# EAGLE board IO_Experiments Board (EAGLE 9.5.1), part 1 of 2
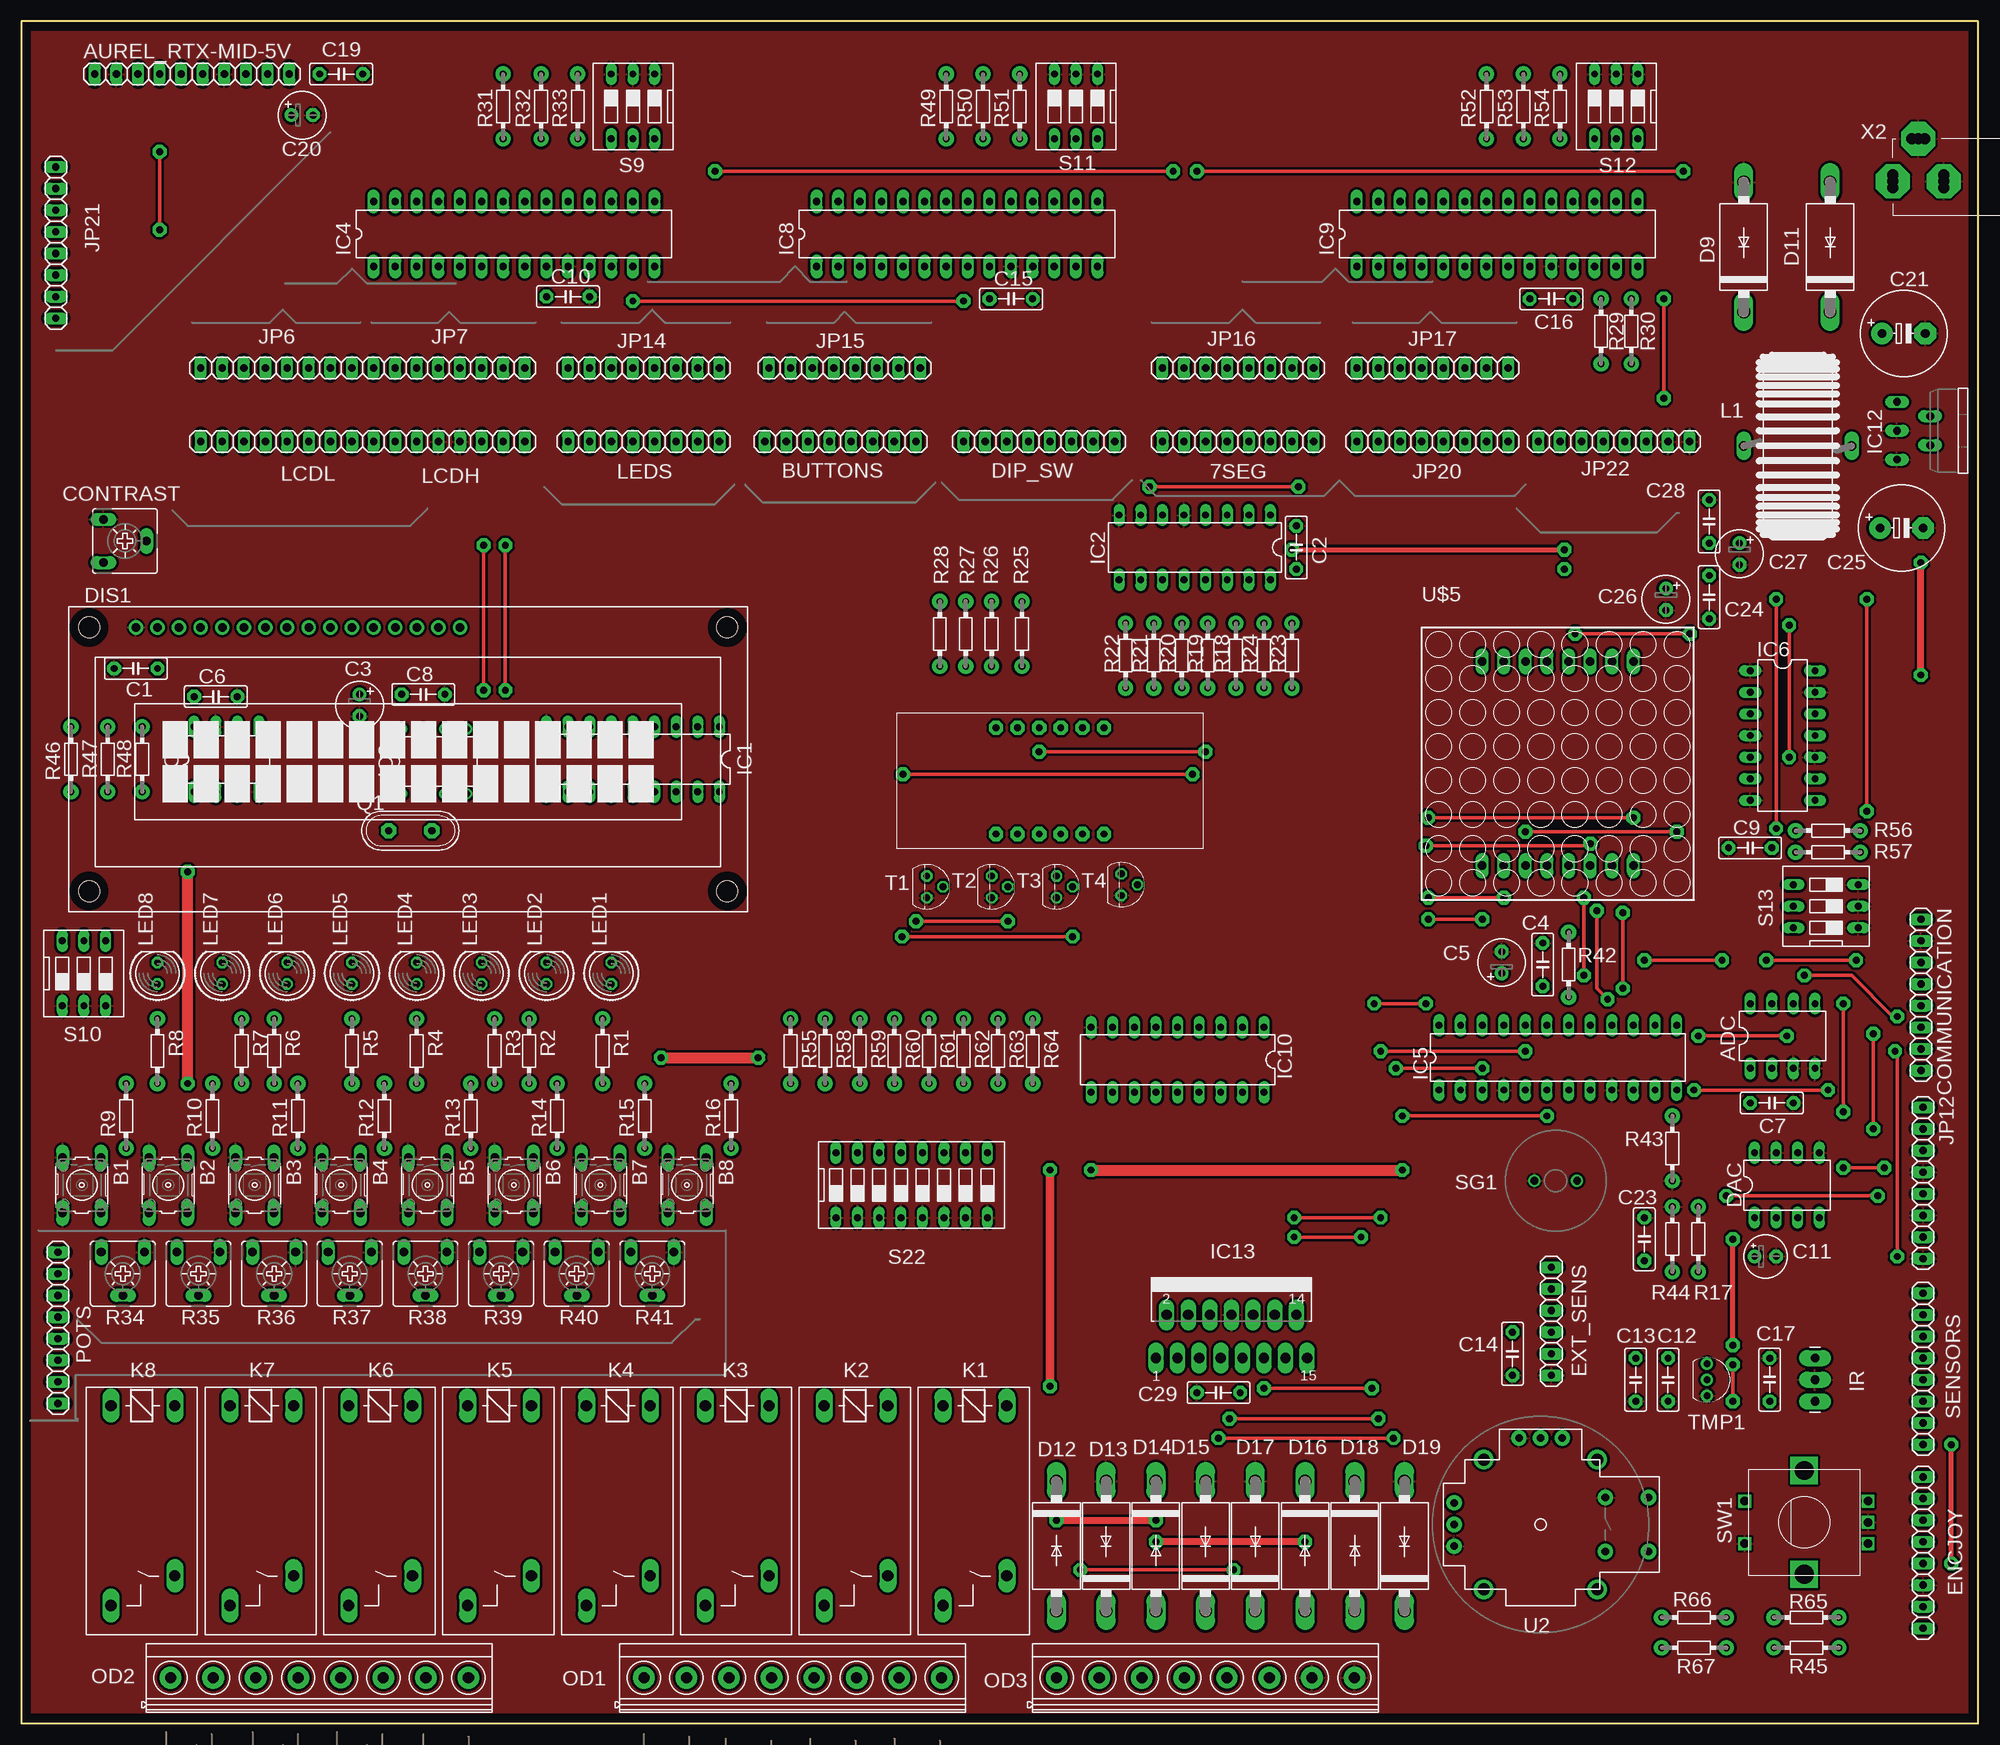
[diagram p0: board, top side]
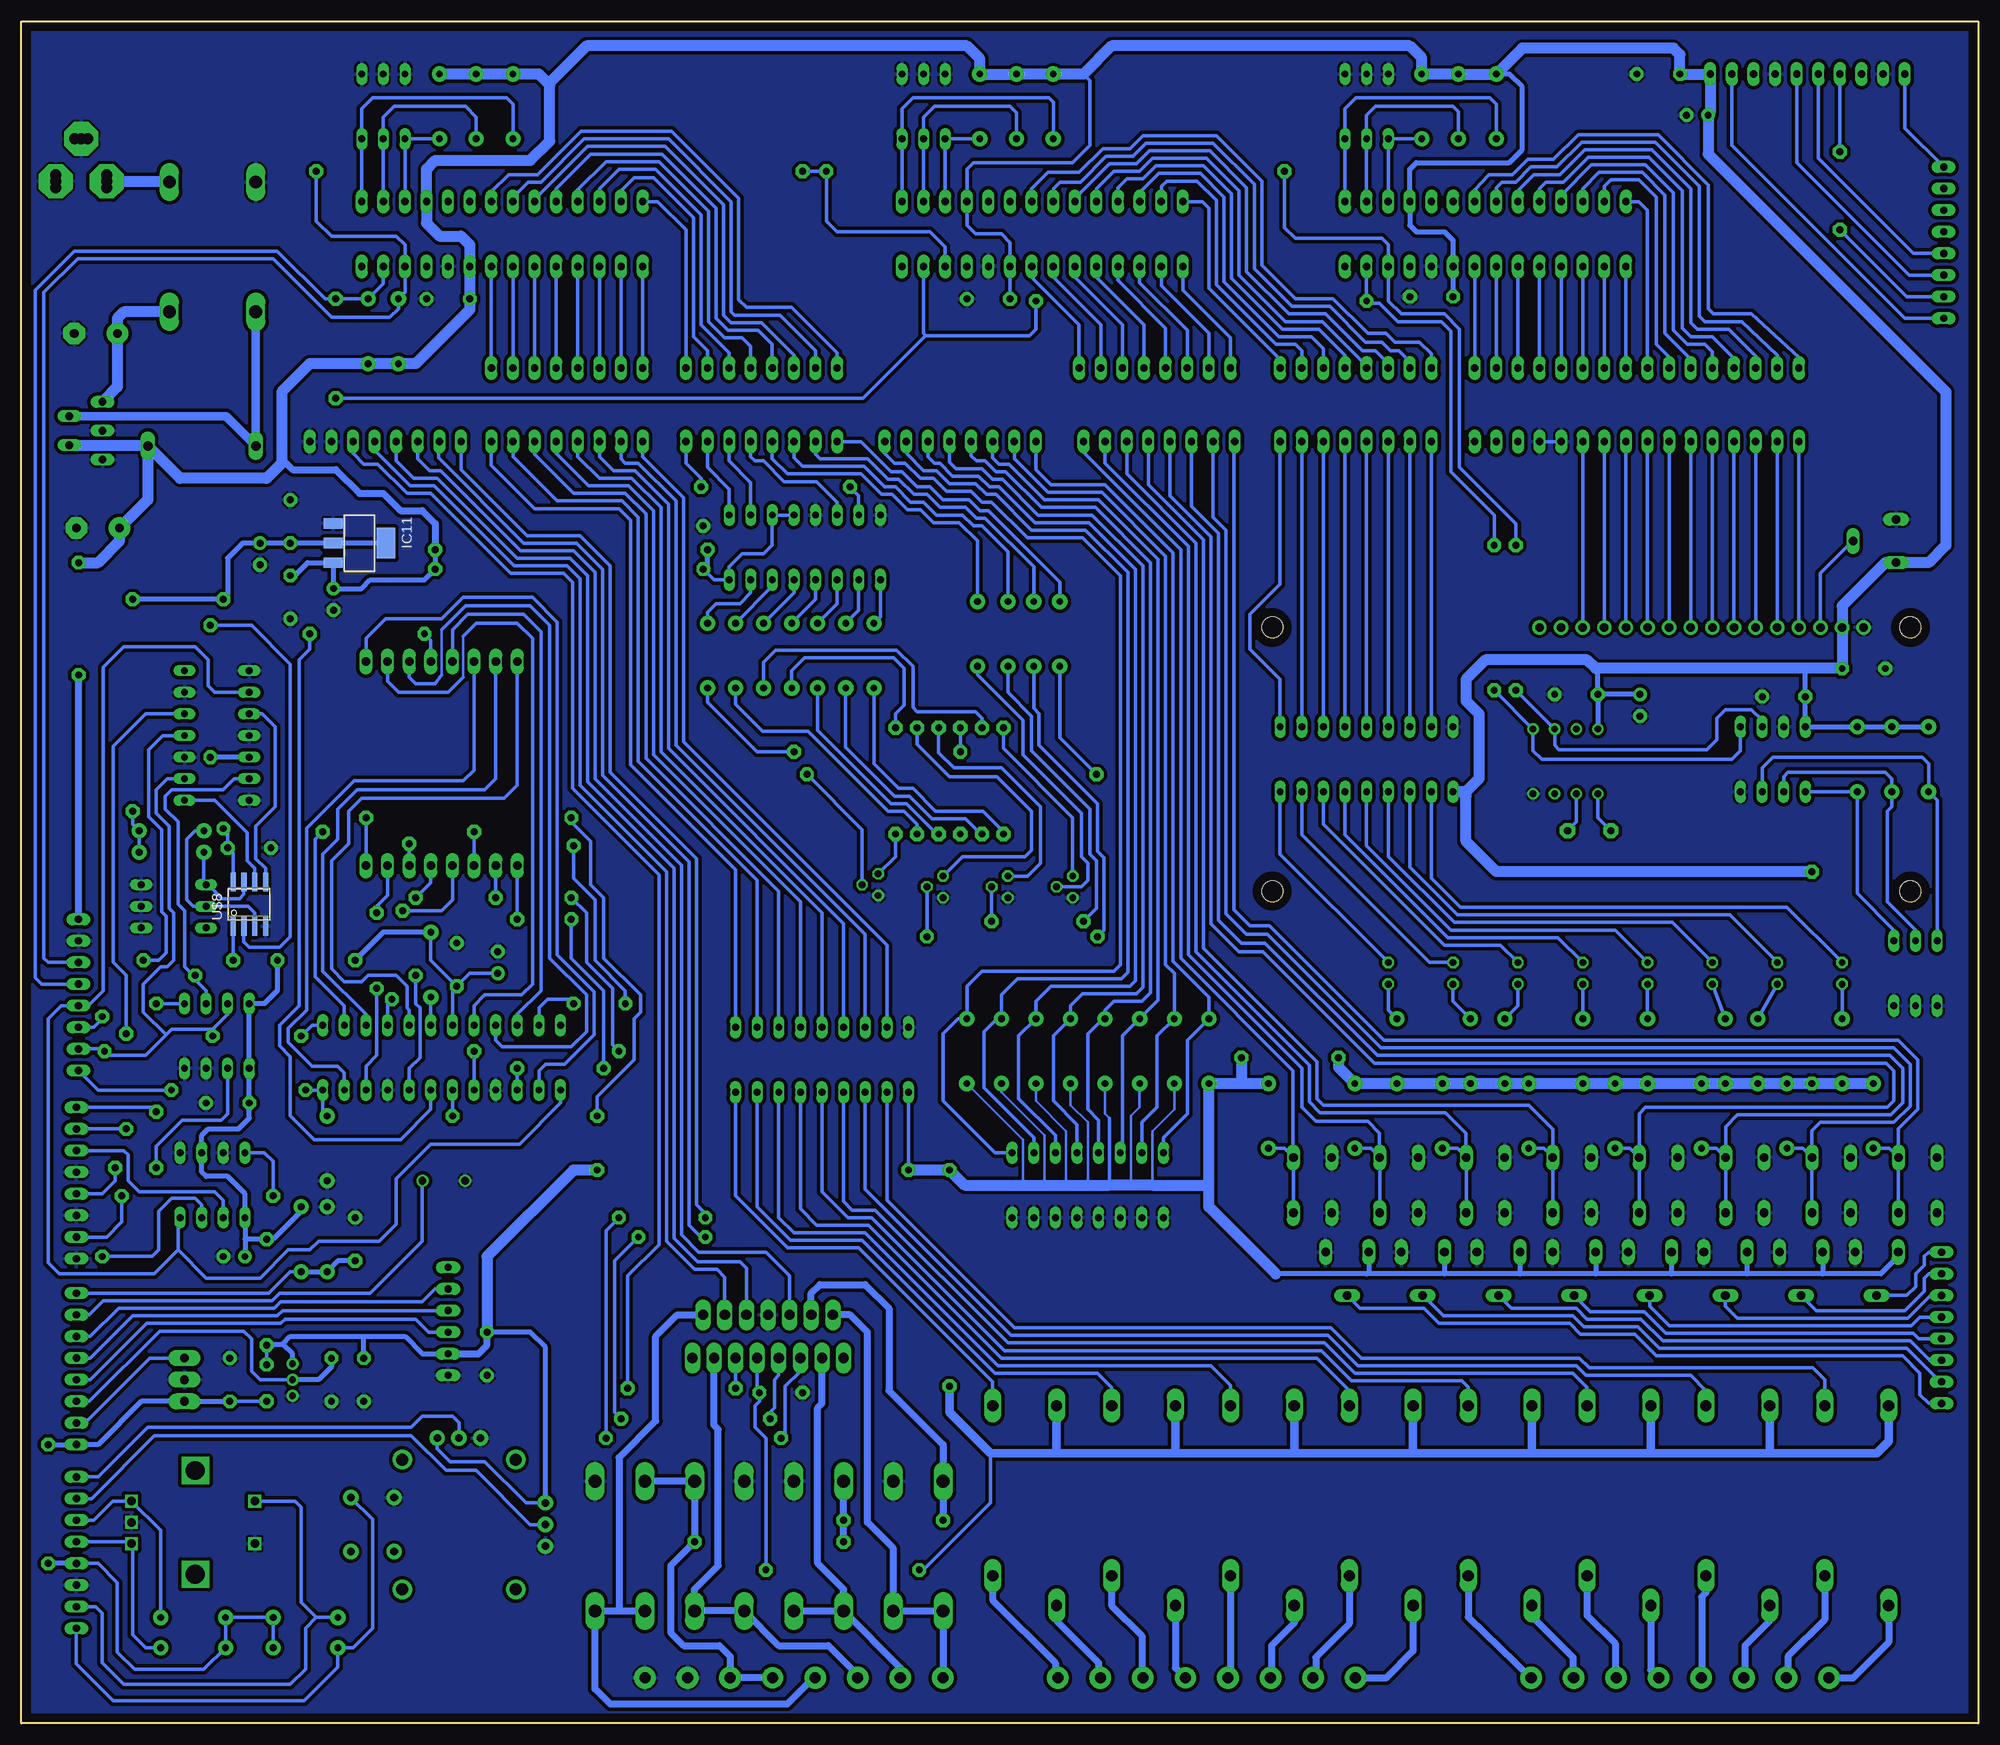
[diagram p1: board, bottom side, seen from below]

Size 230 x 200 mm. Coordinates in mm from the lower left corner, seen from the top.
Outline: 0,0 230,0 230,200 0,200 0,0
Copper layers (1*16): Top 0.035mm / dielectric 1.5mm / Bottom 0.035mm
Design rules "default *": minimum track width 10mil, minimum drill 24mil, track to track 12mil, track to pad 12mil, pad to pad 12mil, via to via 12mil, smd to smd 12mil, copper to edge 40mil, drill to drill 8mil, minimum pad ring 10mil, minimum via ring 16mil, stop-mask expansion 4mil, vias tented up to drill 32mil, thermal gap 10mil
Net classes: 1 power: width 0.61 mm, drill 0.61 mm, clearance 0.254 mm; 2 gnd: width 0.305 mm, drill 0.559 mm, clearance 0.254 mm; 3 usbvcc: width 0.508 mm, drill 0.61 mm, clearance 0.254 mm

## Footprints (pad centres in the part's own frame; a part is rotated, then mirrored left to right if it is on the bottom)
1X08 = drill 0.85 pad 1.422 long: 1 -8.89,0; 2 -6.35,0; 3 -3.81,0; 4 -1.27,0; 5 1.27,0; 6 3.81,0; 7 6.35,0; 8 8.89,0
DIL08 = drill 0.813 long: 1 -3.81,-3.81; 2 -1.27,-3.81; 3 1.27,-3.81; 4 3.81,-3.81; 5 3.81,3.81; 6 1.27,3.81; 7 -1.27,3.81; 8 -3.81,3.81
1X10 = drill 0.85 pad 1.422 long: 1 -11.43,0; 2 -8.89,0; 3 -6.35,0; 4 -3.81,0; 5 -1.27,0; 6 1.27,0; 7 3.81,0; 8 6.35,0; 9 8.89,0; 10 11.43,0
B3F-10XX = drill 1.016 long: 1 -3.251,2.261; 2 3.251,2.261; 3 -3.251,-2.261; 4 3.251,-2.261
C5B2.5 = drill 0.813 pad 1.6 octagon: 1 -2.54,0; 2 2.54,0
E2,5-6 = drill 0.813 pad 1.6: + -1.27,0 | drill 0.813 pad 1.6 octagon: - 1.27,0
E2,5-5 = drill 0.813 pad 1.6: + -1.27,0 | drill 0.813 pad 1.6 octagon: - 1.27,0
E5-10,5 = drill 1.016 pad 2.54: + -2.54,0 | drill 1.016 pad 2.54 octagon: - 2.54,0
CA6V = drill 1.016 long: A -2.54,-2.54; E 2.54,-2.54; S 0,2.54
DO201-15 = drill 1.499 long: A 7.62,0; C -7.62,0
TUXGR_16X2_R2 = drill 1 pad 1.676: 1 -32,15.5; 2 -29.46,15.5; 3 -26.92,15.5; 4 -24.38,15.5; 5 -21.84,15.5; 6 -19.3,15.5; 7 -16.76,15.5; 8 -14.22,15.5; 9 -11.68,15.5; 10 -9.14,15.5; 11 -6.6,15.5; 12 -4.06,15.5; 13 -1.52,15.5; 14 1.02,15.5; 15 3.56,15.5; 16 6.1,15.5 | hole 2.5: -37.5,-15.5; 37.5,-15.5; -37.5,15.5; 37.5,15.5
LFD039AUE = drill 0.8 pad 1.676 octagon: 1 -6.35,-6.25; 2 -3.81,-6.25; 3 -1.27,-6.25; 4 1.27,-6.25; 5 3.81,-6.25; 6 6.35,-6.25; 7 6.35,6.25; 8 3.81,6.25; 9 1.27,6.25; 10 -1.27,6.25; 11 -3.81,6.25; 12 -6.35,6.25
1X06 = drill 0.85 pad 1.422 long: 1 -6.35,0; 2 -3.81,0; 3 -1.27,0; 4 1.27,0; 5 3.81,0; 6 6.35,0
DIL18 = drill 0.813 long: 1 -10.16,-3.81; 2 -7.62,-3.81; 3 -5.08,-3.81; 4 -2.54,-3.81; 5 0,-3.81; 6 2.54,-3.81; 7 5.08,-3.81; 8 7.62,-3.81; 9 10.16,-3.81; 10 10.16,3.81; 11 7.62,3.81; 12 5.08,3.81; 13 2.54,3.81; 14 0,3.81; 15 -2.54,3.81; 16 -5.08,3.81; 17 -7.62,3.81; 18 -10.16,3.81
DIL16 = drill 0.813 long: 1 -8.89,-3.81; 2 -6.35,-3.81; 3 -3.81,-3.81; 4 -1.27,-3.81; 5 1.27,-3.81; 6 3.81,-3.81; 7 6.35,-3.81; 8 8.89,-3.81; 9 8.89,3.81; 10 6.35,3.81; 11 3.81,3.81; 12 1.27,3.81; 13 -1.27,3.81; 14 -3.81,3.81; 15 -6.35,3.81; 16 -8.89,3.81
DIL08' = drill 0.813 pad 1.27: 1 -3.81,-3.81; 2 -1.27,-3.81; 3 1.27,-3.81; 4 3.81,-3.81; 5 3.81,3.81; 6 1.27,3.81; 7 -1.27,3.81; 8 -3.81,3.81
DIL28-3 = drill 0.85 pad 1.422 long: 1 -16.51,-3.81; 2 -13.97,-3.81; 3 -11.43,-3.81; 4 -8.89,-3.81; 5 -6.35,-3.81; 6 -3.81,-3.81; 7 -1.27,-3.81; 8 1.27,-3.81; 9 3.81,-3.81; 10 6.35,-3.81; 11 8.89,-3.81; 12 11.43,-3.81; 13 13.97,-3.81; 14 16.51,-3.81; 15 16.51,3.81; 16 13.97,3.81; 17 11.43,3.81; 18 8.89,3.81; 19 6.35,3.81; 20 3.81,3.81; 21 1.27,3.81; 22 -1.27,3.81; 23 -3.81,3.81; 24 -6.35,3.81; 25 -8.89,3.81; 26 -11.43,3.81; 27 -13.97,3.81; 28 -16.51,3.81
DIL24-3 = drill 0.813 long: 1 -13.97,-3.81; 2 -11.43,-3.81; 3 -8.89,-3.81; 4 -6.35,-3.81; 5 -3.81,-3.81; 6 -1.27,-3.81; 7 1.27,-3.81; 8 3.81,-3.81; 9 6.35,-3.81; 10 8.89,-3.81; 11 11.43,-3.81; 12 13.97,-3.81; 13 13.97,3.81; 14 11.43,3.81; 15 8.89,3.81; 16 6.35,3.81; 17 3.81,3.81; 18 1.27,3.81; 19 -1.27,3.81; 20 -3.81,3.81; 21 -6.35,3.81; 22 -8.89,3.81; 23 -11.43,3.81; 24 -13.97,3.81
DIL14 = drill 0.813 long: 1 -7.62,-3.81; 2 -5.08,-3.81; 3 -2.54,-3.81; 4 0,-3.81; 5 2.54,-3.81; 6 5.08,-3.81; 7 7.62,-3.81; 8 7.62,3.81; 9 5.08,3.81; 10 2.54,3.81; 11 0,3.81; 12 -2.54,3.81; 13 -5.08,3.81; 14 -7.62,3.81
SOT223 = smd 1.219 x 2.235: 1 -2.311,-3.099; 2 0,-3.099; 3 2.311,-3.099 | smd 3.6 x 2.2: 4 0,3.099
TO220-51 = drill 0.9 long: 1 -3.4,-8.4; 2 -1.7,-4.5; 3 0,-8.4; 4 1.7,-4.5; 5 3.4,-8.4
MULTIWATT-15 = drill 1.2 long: 1 -8.89,-7.62; 2 -7.62,-2.54; 3 -6.35,-7.62; 4 -5.08,-2.54; 5 -3.81,-7.62; 6 -2.54,-2.54; 7 -1.27,-7.62; 8 0,-2.54; 9 1.27,-7.62; 10 2.54,-2.54; 11 3.81,-7.62; 12 5.08,-2.54; 13 6.35,-7.62; 14 7.62,-2.54; 15 8.89,-7.62
1X03_LONGPADS = drill 1.016 pad 1.88 long: 1 0,0; 2 2.54,0; 3 5.08,0
G2RA = drill 1.321 long: 1 -3.81,-3.683; 2 -3.81,3.81; P 16.18,3.81; S 19.685,-3.683
SFT1030 = drill 1.118 long: 1 -6.35,0; 2 6.35,0
LED5MM = drill 0.813 octagon: A -1.27,0; K 1.27,0
MKDSN1,5/8-5,08 = drill 1.3 pad 2.54: 1 -17.5,0.025; 2 -12.5,0.025; 3 -7.5,0.025; 4 -2.5,0.025; 6 7.5,0.025; 7 12.5,0.025; 8 17.5,0.025 | drill 1.3 pad 2.5: 5 2.5,0.025
QS = drill 0.85 pad 1.778 octagon: 1 -2.54,0; 2 2.54,0
RS1/8 = drill 0.8 pad 1.778: 1 -3.81,0; 2 3.81,0
DS-03 = drill 0.813 long: 1 -2.54,-3.81; 2 0,-3.81; 3 2.54,-3.81; 4 2.54,3.81; 5 0,3.81; 6 -2.54,3.81
DS-08 = drill 0.813 long: 1 -8.89,-3.81; 2 -6.35,-3.81; 3 -3.81,-3.81; 4 -1.27,-3.81; 5 1.27,-3.81; 6 3.81,-3.81; 7 6.35,-3.81; 8 8.89,-3.81; 9 8.89,3.81; 10 6.35,3.81; 11 3.81,3.81; 12 1.27,3.81; 13 -1.27,3.81; 14 -3.81,3.81; 15 -6.35,3.81; 16 -8.89,3.81
BUZZER-12MM-NS-P5MM = drill 0.9: + 2.5,0; - -2.5,0
ALPS_EC12E_SW = drill 1 square: A -2.5,-7.5; B 2.5,-7.5; C 0,-7.5; D -2.5,7; E 2.5,7 | drill 2.2 square: GND1 -6.1,0; GND2 6.1,0
TO92 = drill 0.813 octagon: 1 1.27,0; 2 0,1.905; 3 -1.27,0
BC-TO92 = drill 0.8 pad 1.422: 1 -1.87,0; 2 0,0; 3 1.87,0
JOYSTICK = drill 0.9 pad 1.778: B1A -3.175,12.7; B1B 3.175,12.7; B2A -3.175,7.62; B2B 3.175,7.62 | drill 0.889 pad 1.778: H1 -2.54,-10.16; H2 0,-10.16; H3 2.54,-10.16; V1 -10.16,2.54; V2 -10.16,0; V3 -10.16,-2.54 | drill 1.397 pad 2.286: MOUNT1 -7.62,6.668; MOUNT2 -7.62,-6.668; MOUNT3 7.62,-6.668; MOUNT4 7.62,6.668
NFM-12881BG-11 = drill 1 long: 1 -8.89,-12; 2 -6.35,-12; 3 -3.81,-12; 4 -1.27,-12; 5 1.27,-12; 6 3.81,-12; 7 6.35,-12; 8 8.89,-12; 9 8.89,12; 10 6.35,12; 11 3.81,12; 12 1.27,12; 13 -1.27,12; 14 -3.81,12; 15 -6.35,12; 16 -8.89,12
SOIC-8 = smd 0.6 x 2.2: 1 -1.905,-2.6; 2 -0.635,-2.6; 3 0.635,-2.6; 4 1.905,-2.6; 5 1.905,2.6; 6 0.635,2.6; 7 -0.635,2.6; 8 -1.905,2.6
POWERSUPPLY_DC-21MM = drill 1.3 pad 4 octagon: 1 -5.08,-3.353; 2 -0.076,-6.35; 3 -0.076,-0.356 | drill 1.3: 4 -5.08,-4.115; 5 -5.08,-2.591; 6 -0.838,-0.356; 7 0.686,-0.356; 8 -0.838,-6.35; 9 0.686,-6.35

## Placement (x,y rotation side)
7SEG  FH254-108DF08500V  [1X08]  143,150.62 180 top
ADC  MCP3201-CI/P  [DIL08]  207.01,80.77 0 top
AUREL_RTX-MID-5V  FH254-110DF08500V  [1X10]  20.07,193.8 0 top
B1  10-XX  [B3F-10XX]  7.11,63.25 270 top
B2  10-XX  [B3F-10XX]  17.27,63.25 270 top
B3  10-XX  [B3F-10XX]  27.43,63.25 270 top
B4  10-XX  [B3F-10XX]  37.59,63.25 270 top
B5  10-XX  [B3F-10XX]  47.75,63.25 270 top
B6  10-XX  [B3F-10XX]  57.91,63.25 270 top
B7  10-XX  [B3F-10XX]  68.07,63.25 270 top
B8  10-XX  [B3F-10XX]  78.23,63.25 270 top
BUTTONS  FH254-108DF08500V  [1X08]  96.27,150.62 0 top
C1  100nF  [C5B2.5]  13.46,123.95 180 top
C2  100nF  [C5B2.5]  149.86,138.18 90 top
C3  1uF  [E2,5-6]  39.75,119.63 270 top
C4  100nF  [C5B2.5]  178.82,89.15 90 top
C5  1uF  [E2,5-6]  173.99,89.41 90 top
C6  100nF  [C5B2.5]  22.86,120.65 0 top
C7  100nF  [C5B2.5]  205.74,72.9 0 top
C8  100nF  [C5B2.5]  47.24,120.9 0 top
C9  100nF  [C5B2.5]  203.2,102.87 0 top
C10  100nF  [C5B2.5]  64.26,167.64 0 top
C11  1uF  [E2,5-5]  204.98,54.86 0 top
C12  100nF  [C5B2.5]  193.55,40.39 270 top
C13  100nF  [C5B2.5]  189.74,40.39 270 top
C14  100nF  [C5B2.5]  175.26,43.43 270 top
C15  100nF  [C5B2.5]  116.33,167.39 0 top
C16  100nF  [C5B2.5]  179.83,167.39 0 top
C17  100nF  [C5B2.5]  205.49,40.39 90 top
C19  100nF  [C5B2.5]  37.59,193.8 0 top
C20  100uF  [E2,5-6]  33.02,188.98 0 top
C21  470uF  [E5-10,5]  221.23,163.32 0 top
C23  100nF  [C5B2.5]  190.75,56.9 90 top
C24  100nF  [C5B2.5]  198.37,132.33 270 top
C25  470uF  [E5-10,5]  220.98,140.46 0 top
C26  100uF  [E2,5-6]  193.29,132.08 270 top
C27  100uF  [E2,5-6]  201.93,137.41 270 top
C28  100nF  [C5B2.5]  198.37,141.22 90 top
C29  100nF  [C5B2.5]  140.72,38.86 180 top
COMMUNICATION  FH254-108DF08500V  [1X08]  223.27,85.6 270 top
CONTRAST  20k  [CA6V]  12.19,138.94 270 top
D9  1N5822  [DO201-15]  202.44,173.48 90 top
D11  1N5822  [DO201-15]  212.6,173.48 90 top
D12  MBRA140  [DO201-15]  121.67,20.83 270 top
D13  MBRA140  [DO201-15]  127.51,20.83 90 top
D14  MBRA140  [DO201-15]  133.35,20.83 270 top
D15  MBRA140  [DO201-15]  139.19,20.83 90 top
D16  MBRA140  [DO201-15]  150.88,20.83 270 top
D17  MBRA140  [DO201-15]  145.03,20.83 90 top
D18  MBRA140  [DO201-15]  156.72,20.83 270 top
D19  MBRA140  [DO201-15]  162.56,20.83 90 top
DAC  MCP4921  [DIL08]  207.52,63.25 0 top
DIP_SW  FH254-108DF08500V  [1X08]  119.63,150.62 0 top
DIS1  TUXGR_16X2_R2  [TUXGR_16X2_R2]  45.47,113.28 0 top
DISP1  [LFD039AUE]  120.9,110.74 0 top
ENCJOY  FH254-108DF08500V  [1X08]  223.52,20.07 270 top
EXT_SENS  FH254-106DF08500V  [1X06]  179.83,47.24 270 top
IC1  ULN2803  [DIL18]  71.88,113.28 180 top
IC2  4511N  [DIL16]  137.92,138.18 180 top
IC3  PCF8563P  [DIL08']  48.51,113.03 0 top
IC4  MCP23017SP  [DIL28-3]  57.91,175.01 0 top
IC5  MAX7219CNG  [DIL24-3]  180.59,78.23 0 top
IC6  74125N  [DIL14]  207.01,116.08 270 top
IC7  AT24CP  [DIL08]  24.13,113.28 0 top
IC8  MCP23017SP  [DIL28-3]  109.98,175.01 0 top
IC9  MCP23017SP  [DIL28-3]  173.48,175.01 0 top
IC10  ULN2803  [DIL18]  135.89,77.98 180 top
IC11  NX1117CE33Z  [SOT223]  190.25,138.68 270 bottom
IC12  [TO220-51]  228.85,151.89 270 top
IC13  L298  [MULTIWATT-15]  142.24,50.55 0 top
IR  [1X03_LONGPADS]  210.82,42.93 270 top
JP6  FH254-108DF08500V  [1X08]  29.97,159.26 0 top
JP7  FH254-108DF08500V  [1X08]  50.29,159.26 0 top
JP12  FH254-108DF08500V  [1X08]  223.52,63.5 270 top
JP14  FH254-108DF08500V  [1X08]  73.15,159.26 0 top
JP15  FH254-108DF08500V  [1X08]  96.77,159.26 0 top
JP16  FH254-108DF08500V  [1X08]  143,159.26 0 top
JP17  FH254-108DF08500V  [1X08]  165.86,159.26 0 top
JP20  FH254-108DF08500V  [1X08]  165.86,150.62 180 top
JP21  FH254-108DF08500V  [1X08]  4.06,173.99 270 top
JP22  FH254-108DF08500V  [1X08]  187.2,150.62 0 top
K1  G2RA  [G2RA]  112.01,33.53 270 top
K2  G2RA  [G2RA]  98.04,33.53 270 top
K3  G2RA  [G2RA]  84.07,33.53 270 top
K4  G2RA  [G2RA]  70.1,33.53 270 top
K5  G2RA  [G2RA]  56.13,33.53 270 top
K6  G2RA  [G2RA]  42.16,33.53 270 top
K7  G2RA  [G2RA]  28.19,33.53 270 top
K8  G2RA  [G2RA]  14.22,33.53 270 top
L1  SFT1030  [SFT1030]  208.79,150.11 0 top
LCDH  FH254-108DF08500V  [1X08]  50.29,150.62 180 top
LCDL  FH254-108DF08500V  [1X08]  29.97,150.62 180 top
LED1  GREEN_5mm  [LED5MM]  69.34,88.14 90 top
LED2  GREEN_5mm  [LED5MM]  61.72,88.14 90 top
LED3  GREEN_5mm  [LED5MM]  54.1,88.14 90 top
LED4  GREEN_5mm  [LED5MM]  46.48,88.14 90 top
LED5  GREEN_5mm  [LED5MM]  38.86,88.14 90 top
LED6  GREEN_5mm  [LED5MM]  31.24,88.14 90 top
LED7  GREEN_5mm  [LED5MM]  23.62,88.14 90 top
LED8  GREEN_5mm  [LED5MM]  16,88.14 90 top
LEDS  FH254-108DF08500V  [1X08]  73.15,150.62 180 top
OD1  MKDSN1,5/8-5,08  [MKDSN1,5/8-5,08]  90.68,5.33 0 top
OD2  MKDSN1,5/8-5,08  [MKDSN1,5/8-5,08]  35.05,5.33 0 top
OD3  MKDSN1,5/8-5,08  [MKDSN1,5/8-5,08]  139.19,5.33 0 top
POTS  FH254-108DF08500V  [1X08]  4.32,46.48 270 top
Q1  32.768 kHz  [QS]  45.72,104.9 0 top
R1  220  [RS1/8]  68.33,78.99 270 top
R2  220  [RS1/8]  59.69,78.99 270 top
R3  220  [RS1/8]  55.63,78.99 270 top
R4  220  [RS1/8]  46.48,78.99 270 top
R5  220  [RS1/8]  38.86,78.99 270 top
R6  220  [RS1/8]  29.72,78.99 270 top
R7  220  [RS1/8]  25.91,78.99 270 top
R8  220  [RS1/8]  16,78.99 270 top
R9  10k  [RS1/8]  12.32,71.37 90 top
R10  10k  [RS1/8]  22.48,71.37 90 top
R11  10k  [RS1/8]  32.51,71.37 90 top
R12  10k  [RS1/8]  42.67,71.37 90 top
R13  10k  [RS1/8]  52.83,71.37 90 top
R14  10k  [RS1/8]  62.99,71.37 90 top
R15  10k  [RS1/8]  73.28,71.37 90 top
R16  10k  [RS1/8]  83.44,71.37 90 top
R17  [RS1/8]  197.1,56.9 90 top
R18  220  [RS1/8]  142.75,125.48 270 top
R19  220  [RS1/8]  139.45,125.48 270 top
R20  220  [RS1/8]  136.4,125.48 270 top
R21  220  [RS1/8]  133.1,125.48 270 top
R22  220  [RS1/8]  129.79,125.48 270 top
R23  220  [RS1/8]  149.35,125.48 270 top
R24  220  [RS1/8]  146.05,125.48 270 top
R25  4.7k  [RS1/8]  117.6,128.02 270 top
R26  4.7k  [RS1/8]  114.05,128.02 270 top
R27  4.7k  [RS1/8]  111,128.02 270 top
R28  4.7k  [RS1/8]  107.95,128.02 270 top
R29  10k  [RS1/8]  185.67,163.58 270 top
R30  10k  [RS1/8]  189.23,163.58 270 top
R31  10k  [RS1/8]  56.64,189.99 90 top
R32  10k  [RS1/8]  61.09,189.99 90 top
R33  10k  [RS1/8]  65.41,189.99 90 top
R34  20k  [CA6V]  11.94,52.83 180 top
R35  20k  [CA6V]  20.83,52.83 180 top
R36  20k  [CA6V]  29.72,52.83 180 top
R37  20k  [CA6V]  38.61,52.83 180 top
R38  20k  [CA6V]  47.5,52.83 180 top
R39  20k  [CA6V]  56.39,52.83 180 top
R40  20k  [CA6V]  65.28,52.83 180 top
R41  20k  [CA6V]  74.17,52.83 180 top
R42  27k  [RS1/8]  181.86,89.15 270 top
R43  10k  [RS1/8]  194.06,67.56 90 top
R44  10k  [RS1/8]  194.06,56.9 270 top
R45  10k  [RS1/8]  209.8,8.89 180 top
R46  10k  [RS1/8]  5.84,113.28 90 top
R47  10k  [RS1/8]  10.16,113.28 90 top
R48  10k  [RS1/8]  14.22,113.28 90 top
R49  10k  [RS1/8]  108.71,189.99 90 top
R50  10k  [RS1/8]  113.03,189.99 90 top
R51  10k  [RS1/8]  117.35,189.99 90 top
R52  10k  [RS1/8]  172.21,189.99 90 top
R53  10k  [RS1/8]  176.53,189.99 90 top
R54  10k  [RS1/8]  180.85,189.99 90 top
R55  10k  [RS1/8]  90.42,78.99 270 top
R56  10k  [RS1/8]  212.34,104.9 0 top
R57  10k  [RS1/8]  212.34,102.36 0 top
R58  10k  [RS1/8]  94.49,78.99 270 top
R59  10k  [RS1/8]  98.55,78.99 270 top
R60  10k  [RS1/8]  102.62,78.99 270 top
R61  10k  [RS1/8]  106.68,78.99 270 top
R62  10k  [RS1/8]  110.74,78.99 270 top
R63  10k  [RS1/8]  114.81,78.99 270 top
R64  10k  [RS1/8]  118.87,78.99 270 top
R65  10k  [RS1/8]  209.8,12.45 180 top
R66  10k  [RS1/8]  196.6,12.45 0 top
R67  10k  [RS1/8]  196.6,8.89 180 top
S9  3DIP_SW  [DS-03]  71.88,189.99 180 top
S10  3DIP_SW  [DS-03]  7.37,88.14 0 top
S11  3DIP_SW  [DS-03]  123.95,189.99 180 top
S12  3DIP_SW  [DS-03]  187.45,189.99 180 top
S13  3DIP_SW  [DS-03]  212.09,96.01 90 top
S22  8DIP_SW  [DS-08]  104.65,63.25 0 top
SENSORS  FH254-108DF08500V  [1X08]  223.52,41.66 270 top
SG1  [BUZZER-12MM-NS-P5MM]  180.34,63.75 180 top
SW1  EC12E_SW  [ALPS_EC12E_SW]  209.55,23.62 90 top
T1  BC547  [TO92]  106.43,98.3 270 top
T2  BC547  [TO92]  114.05,98.3 270 top
T3  BC547  [TO92]  121.67,98.3 270 top
T4  BC547  [TO92]  129.29,98.55 270 top
TMP1  TMP36  [BC-TO92]  198.12,40.39 270 top
U2  JOYSTICK  [JOYSTICK]  178.56,23.37 270 top
U$5  LMD12088AUE-101A  [NFM-12881BG-11]  180.59,112.78 0 top
U$8  25VF512A-33SAE  [SOIC-8]  203.2,96.27 0 bottom
X2  POWERSUPPLY_DC21MMX  [POWERSUPPLY_DC-21MM]  226.31,181.1 270 top

## Library data of the parts
7SEG BUTTONS COMMUNICATION DIP_SW ENCJOY JP6 JP7 JP12 JP14-JP17 JP20-JP22 LCDH LCDL LEDS POTS SENSORS = Connettori; MONTHLY_USAGE: _____; PART_NUMBER: FH254-108DF08500V; PRICE: _____; SUPPLIER: _____; TYPE: Connettori
ADC = nootropicdesign
AUREL_RTX-MID-5V = Connettori; MONTHLY_USAGE: _____; PART_NUMBER: FH254-110DF08500V; PRICE: _____; SUPPLIER: _____; TYPE: Connettori
B1-B8 = switch-misc; MPN: B3F-1000; OC_FARNELL: 176432; OC_NEWARK: 36M3542
C1-C17 C19-C21 C23 C25-C27 C29 = capacitors
C24 C28 = SmartHomePLC_Licenta; LIBRARY: SmartHomePLC; TYPE: capacitor
CONTRAST R34-R41 = POT
D9 D11-D19 = diode
DAC = adafruit
DIS1 = opto; OC_FARNELL: unknown; OC_NEWARK: unknown
DISP1 = opto
EXT_SENS = Connettori; MONTHLY_USAGE: 86722.85; PART_NUMBER: FH254-106DF08500V; PRICE: _0.03; SUPPLIER: CBC_elettronica__s.r.l.; TYPE: Connettori
IC1 IC2 IC10 IC12 U$8 = Integrated Circuits
IC3 IC4 IC6 IC8 IC9 = SmartHomePLC_Licenta; LIBRARY: SmartHomePLC; TYPE: IC
IC5 = Integrated Circuits; MF: MAXIM; MPN: MAX7219CNG; OC_FARNELL: 1523914; OC_NEWARK: 34C4018
IC7 = atmel; MPN: AT24C1024BW-SH-B; OC_FARNELL: 1362646; OC_NEWARK: 03P2044
IC11 = IntegratedCircuits; CASE: SOT223; MONTHLY_USAGE: _____; PART_NUMBER: NX1117CE33Z,115; PRICE: _____; SUPPLIER: _____; TYPE: Circuito_Integrato
IC13 = st-microelectronics; MPN: L298N; OC_FARNELL: 1589425; OC_NEWARK: 32M1527
IR = SmartHomePLC_Licenta; LIBRARY: SmartHomePLC; TYPE: connector header pcb
K1-K8 = SmartHomePLC_Licenta; LIBRARY: SmartHomePLC; TYPE: releu
L1 = inductors
LED1-LED8 = opto; MONTHLY_USAGE: _____; PART_NUMBER: L-7113GT; PRICE: _____; SUPPLIER: _____; TYPE: Opto
OD1-OD3 = SmartHomePLC_Licenta; LIBRARY: SmartHomePLC; TYPE: conector power
Q1 = SmartHomePLC_Licenta; LIBRARY: SmartHomePLC; TYPE: Cristal de quartz
R1-R28 R45 R55 R58-R67 = rezistors; OC_FARNELL: unknown; OC_NEWARK: unknown
R29-R33 R42-R44 R46-R54 R56 R57 = SmartHomePLC_Licenta; LIBRARY: SmartHomePLC; TYPE: Rezistori
S9-S13 = switch-misc; OC_FARNELL: 1255223; OC_NEWARK: unknown
S22 = switch-misc; MPN: DS08; OC_FARNELL: unknown; OC_NEWARK: 73J0071
SG1 = Trasduttori
SW1 = switch-alps; MPN: EC12E2424407; OC_FARNELL: 1520813; OC_NEWARK: 74M1068
T1-T4 = Transistors
TMP1 = SmartHomePLC_Licenta; LIBRARY: SmartHomePLC; TYPE: sensor
U2 = SparkFun
U$5 = eagle-library-edeca.net-v5
X2 = SmartPrj

## Nets
1A0: IC4.21 JP6.1
1A1: IC4.22 JP6.2
1A2: IC4.23 JP6.3
1A3: IC4.24 JP6.4
1A4: IC4.25 JP6.5
1A5: IC4.26 JP6.6
1A6: IC4.27 JP6.7
1A7: IC4.28 JP6.8
1B0: IC4.1 JP7.1
1B1: IC4.2 JP7.2
1B2: IC4.3 JP7.3
1B3: IC4.4 JP7.4
1B4: IC4.5 JP7.5
1B5: IC4.6 JP7.6
1B6: IC4.7 JP7.7
1B7: IC4.8 JP7.8
2A0: IC8.21 JP14.1
2A1: IC8.22 JP14.2
2A2: IC8.23 JP14.3
2A3: IC8.24 JP14.4
2A4: IC8.25 JP14.5
2A5: IC8.26 JP14.6
2A6: IC8.27 JP14.7
2A7: IC8.28 JP14.8
2B0: IC8.1 JP15.1
2B1: IC8.2 JP15.2
2B2: IC8.3 JP15.3
2B3: IC8.4 JP15.4
2B4: IC8.5 JP15.5
2B5: IC8.6 JP15.6
2B6: IC8.7 JP15.7
2B7: IC8.8 JP15.8
3A0: IC9.21 JP16.1
3A1: IC9.22 JP16.2
3A2: IC9.23 JP16.3
3A3: IC9.24 JP16.4
3A4: IC9.25 JP16.5
3A5: IC9.26 JP16.6
3A6: IC9.27 JP16.7
3A7: IC9.28 JP16.8
3B0: IC9.1 JP17.1
3B1: IC9.2 JP17.2
3B2: IC9.3 JP17.3
3B3: IC9.4 JP17.4
3B4: IC9.5 JP17.5
3B5: IC9.6 JP17.6
3B6: IC9.7 JP17.7
3B7: IC9.8 JP17.8
+3V3: C9.2 C27.+ C28.1 IC11.2 IC11.4 R56.2 R57.2 U$8.8
+5V: ADC.1 ADC.8 AUREL_RTX-MID-5V.10 C1.1 C2.1 C3.+ C4.1 C5.+ C6.1 C7.1 C8.1 C10.1 C11.+ C13.1 C14.1 C15.1 C16.1 C17.1 C19.1 C20.+ C24.1 C25.+ C26.+ C29.1 COMMUNICATION.1 CONTRAST.E DAC.1 DAC.6 DIS1.2 ENCJOY.5 EXT_SENS.5 IC1.10 IC2.3 IC2.4 IC2.16 IC3.8 IC4.9 IC4.18 IC5.19 IC7.8 IC8.9 IC8.18 IC9.9 IC9.18 IC10.10 IC11.3 IC12.4 IC13.9 IR.3 K1.1 K2.1 K3.1 K4.1 K5.1 K6.1 K7.1 K8.1 L1.2 R1.2 R2.2 R3.2 R4.2 R5.2 R6.2 R7.2 R8.2 R9.2 R10.2 R11.2 R12.2 R13.2 R14.2 R15.2 R16.2 R17.2 R29.2 R30.2 R31.2 R32.2 R33.2 R34.E R35.E R36.E R37.E R38.E R39.E R40.E R41.E R42.1 R45.2 R46.2 R47.2 R48.2 R49.2 R50.2 R51.2 R52.2 R53.2 R54.2 R55.2 R58.2 R59.2 R60.2 R61.2 R62.2 R63.2 R64.2 R65.2 R66.2 R67.1 SENSORS.8 TMP1.1 U2.H1 U2.V1
A: DISP1.11 R18.2
ADC_IN: ADC.2 JP12.5
ANTENNA: AUREL_RTX-MID-5V.1 JP21.1
B: DISP1.7 R19.2
BUZZER: SENSORS.2 SG1.-
C: DISP1.4 R20.2
CONTRAST: CONTRAST.S DIS1.3
CS_ADC: ADC.5 JP12.1
CS_DAC: DAC.2 JP12.3
CS_FLASH: IC6.12 JP12.2
D: DISP1.2 R21.2
D1: 7SEG.5 R25.1
D2: 7SEG.6 R26.1
D3: 7SEG.7 R27.1
D4: 7SEG.8 R28.1
DAC_OUT: DAC.8 JP12.7
DIRA: IC13.5 JP22.1
DIRA#: IC13.7 JP22.2
DIRB: IC13.10 JP22.4
DIRB#: IC13.12 JP22.5
E: DISP1.1 R22.2
ENABLE: AUREL_RTX-MID-5V.6 JP21.6
ENC_A: ENCJOY.3 R65.1 SW1.B
ENC_B: ENCJOY.4 R45.1 SW1.A
ENC_SW: ENCJOY.7 R66.1 SW1.E
EXTERN_SIG1: EXT_SENS.3 SENSORS.4
EXTERN_SIG2: EXT_SENS.2 SENSORS.3
F: DISP1.10 R23.2
G: DISP1.5 R24.2
GND: ADC.3 ADC.4 AUREL_RTX-MID-5V.2 AUREL_RTX-MID-5V.7 B1.3 B1.4 B2.3 B2.4 B3.3 B3.4 B4.3 B4.4 B5.3 B5.4 B6.3 B6.4 B7.3 B7.4 B8.3 B8.4 C1.2 C2.2 C3.- C4.2 C5.- C6.2 C7.2 C8.2 C9.1 C10.2 C11.- C12.2 C13.2 C14.2 C15.2 C16.2 C17.2 C19.2 C20.- C21.- C23.2 C24.2 C25.- C26.- C27.- C28.2 C29.2 COMMUNICATION.2 CONTRAST.A D9.A D13.A D15.A D17.A D19.A DAC.5 DAC.7 DIS1.1 ENCJOY.6 EXT_SENS.6 IC1.9 IC2.5 IC2.8 IC3.4 IC4.10 IC5.4 IC5.9 IC6.1 IC6.4 IC6.7 IC6.10 IC6.13 IC7.4 IC7.7 IC8.10 IC9.10 IC10.9 IC11.1 IC12.3 IC12.5 IC13.8 IR.2 JP12.4 JP12.6 JP12.8 JP22.7 JP22.8 LCDH.4 LCDH.5 OD3.7 OD3.8 R34.A R35.A R36.A R37.A R38.A R39.A R40.A R41.A R43.1 R44.1 S9.1 S9.2 S9.3 S10.1 S10.2 S10.3 S11.1 S11.2 S11.3 S12.1 S12.2 S12.3 S13.1 S13.2 S13.3 S22.1 S22.2 S22.3 S22.4 S22.5 S22.6 S22.7 S22.8 SG1.+ SW1.C SW1.D T1.1 T2.1 T3.1 T4.1 TMP1.3 U2.B2A U2.H3 U2.V3 U$8.4 X2.1 X2.3
HORIZONTAL: ENCJOY.2 U2.H2
IA: 7SEG.1 IC2.7
IB: 7SEG.2 IC2.1
IC: 7SEG.3 IC2.2
ID: 7SEG.4 IC2.6
IR: IR.1 SENSORS.7
JOY_SW: ENCJOY.8 R67.2 U2.B1A
LCD_D0: DIS1.7 LCDL.5
LCD_D1: DIS1.8 LCDL.4
LCD_D2: DIS1.9 LCDL.3
LCD_D3: DIS1.10 LCDL.2
LCD_D4: DIS1.11 LCDL.1
LCD_D5: DIS1.12 LCDH.8
LCD_D6: DIS1.13 LCDH.7
LCD_D7: DIS1.14 LCDH.6
LCD_E: DIS1.6 LCDL.6
LCD_RS: DIS1.4 LCDL.8
LCD_RW: DIS1.5 LCDL.7
LUMINA: C23.1 R17.1 R44.2 SENSORS.1
MISO: ADC.6 COMMUNICATION.6 IC6.6
MOSI: COMMUNICATION.5 DAC.4 IC5.1 IC6.2
N$1: IC1.1 LEDS.1
N$2: IC1.2 LEDS.2
N$3: IC1.3 LEDS.3
N$4: IC1.4 LEDS.4
N$5: IC1.5 LEDS.5
N$6: IC1.6 LEDS.6
N$7: IC1.7 LEDS.7
N$8: IC1.8 LEDS.8
N$9: IC1.18 LED1.K
N$10: IC1.17 LED2.K
N$11: IC1.16 LED3.K
N$12: IC1.15 LED4.K
N$13: IC1.14 LED5.K
N$14: IC1.13 LED6.K
N$15: IC1.12 LED7.K
N$16: IC1.11 LED8.K
N$17: LED1.A R1.1
N$18: LED2.A R2.1
N$19: LED3.A R3.1
N$20: LED4.A R4.1
N$21: LED5.A R5.1
N$22: LED6.A R6.1
N$23: LED7.A R7.1
N$24: LED8.A R8.1
N$26: B1.1 B1.2 BUTTONS.1 R9.1
N$28: B2.1 B2.2 BUTTONS.2 R10.1
N$29: B3.1 B3.2 BUTTONS.3 R11.1
N$30: B4.1 B4.2 BUTTONS.4 R12.1
N$31: B5.1 B5.2 BUTTONS.5 R13.1
N$32: B6.1 B6.2 BUTTONS.6 R14.1
N$33: B7.1 B7.2 BUTTONS.7 R15.1
N$34: B8.1 B8.2 BUTTONS.8 R16.1
N$45: IC2.13 R18.1
N$46: IC2.12 R19.1
N$47: IC2.11 R20.1
N$48: IC2.10 R21.1
N$49: IC2.9 R22.1
N$50: IC2.15 R23.1
N$51: IC2.14 R24.1
N$52: DISP1.12 T1.3
N$53: DISP1.9 T2.3
N$54: DISP1.8 T3.3
N$55: DISP1.6 T4.3
N$56: R26.2 T2.2
N$57: R27.2 T3.2
N$58: R28.2 T4.2
N$59: R25.2 T1.2
N$73: IC3.1 Q1.1
N$74: IC3.2 Q1.2
N$86: IC5.2 U$5.9
N$87: IC5.11 U$5.14
N$88: POTS.1 R34.S
N$89: POTS.2 R35.S
N$90: IC4.15 R31.1 S9.6
N$91: IC4.16 R32.1 S9.5
N$92: IC4.17 R33.1 S9.4
N$93: POTS.3 R36.S
N$94: POTS.4 R37.S
N$95: POTS.5 R38.S
N$96: POTS.6 R39.S
N$97: POTS.7 R40.S
N$98: POTS.8 R41.S
N$99: K1.P OD1.8
N$100: IC5.6 U$5.8
N$101: IC5.7 U$5.12
N$102: IC5.3 U$5.1
N$103: IC5.10 U$5.7
N$104: IC5.5 U$5.2
N$105: IC5.8 U$5.5
N$106: IC5.22 U$5.13
N$107: IC5.17 U$5.16
N$108: IC5.14 U$5.3
N$109: IC5.16 U$5.4
N$110: IC5.20 U$5.10
N$111: IC5.23 U$5.6
N$112: IC5.21 U$5.11
N$113: IC5.15 U$5.15
N$115: IC5.18 R42.2
N$117: IC7.1 R48.1 S10.4
N$118: IC7.2 R47.1 S10.5
N$119: IC7.3 R46.1 S10.6
N$138: IC8.15 R49.1 S11.6
N$139: IC8.16 R50.1 S11.5
N$140: IC8.17 R51.1 S11.4
N$157: IC9.15 R52.1 S12.6
N$158: IC9.16 R53.1 S12.5
N$159: IC9.17 R54.1 S12.4
N$165: K1.S OD1.7
N$166: K2.P OD1.6
N$167: K2.S OD1.5
N$168: K3.P OD1.4
N$169: K3.S OD1.3
N$170: K4.P OD1.2
N$171: K4.S OD1.1
N$172: K5.P OD2.8
N$173: IC10.18 K1.2
N$174: IC10.17 K2.2
N$175: IC10.16 K3.2
N$176: IC10.15 K4.2
N$177: IC10.14 K5.2
N$178: IC10.13 K6.2
N$179: IC10.12 K7.2
N$180: IC10.11 K8.2
N$181: K5.S OD2.7
N$182: K6.P OD2.6
N$183: K6.S OD2.5
N$184: K7.P OD2.4
N$185: K7.S OD2.3
N$186: K8.P OD2.2
N$187: K8.S OD2.1
N$189: IC6.5 U$8.2
N$190: IC6.3 U$8.5
N$191: IC6.8 U$8.6
N$192: C21.+ D11.C IC12.1
N$193: IC6.11 U$8.1
N$194: R56.1 S13.5 U$8.3
N$195: R57.1 S13.4 U$8.7
N$196: D9.C IC12.2 L1.1
N$197: D11.A X2.2
N$198: DIP_SW.1 R55.1 S22.16
N$199: DIP_SW.2 R58.1 S22.15
N$200: DIP_SW.3 R59.1 S22.14
N$201: DIP_SW.4 R60.1 S22.13
N$202: DIP_SW.5 R61.1 S22.12
N$203: DIP_SW.6 R62.1 S22.11
N$204: DIP_SW.7 R63.1 S22.10
N$205: DIP_SW.8 R64.1 S22.9
OUT1: D12.A D13.C IC13.2 OD3.1
OUT2: D14.A D15.C IC13.3 OD3.2
OUT3: D16.A D17.C IC13.13 OD3.3
OUT4: D18.A D19.C IC13.14 OD3.4
PWMA: IC13.6 JP22.3
PWMB: IC13.11 JP22.6
REL1: IC10.1 JP20.1
REL2: IC10.2 JP20.2
REL3: IC10.3 JP20.3
REL4: IC10.4 JP20.4
REL5: IC10.5 JP20.5
REL6: IC10.6 JP20.6
REL7: IC10.7 JP20.7
REL8: IC10.8 JP20.8
RX: AUREL_RTX-MID-5V.9 JP21.8
SCK: ADC.7 COMMUNICATION.7 DAC.3 IC5.13 IC6.9
SCL: COMMUNICATION.3 IC3.6 IC4.12 IC7.6 IC8.12 IC9.12 R29.1
SDA: COMMUNICATION.4 IC3.5 IC4.13 IC7.5 IC8.13 IC9.13 R30.1
SENS_EXTERN: EXT_SENS.4 SENSORS.5
SS: COMMUNICATION.8 IC5.12 R43.2
TEMPERATURA: C12.1 SENSORS.6 TMP1.2
TX: AUREL_RTX-MID-5V.4 JP21.7
TX/RX: AUREL_RTX-MID-5V.5 JP21.5
VCC: IC6.14
VERTICAL: ENCJOY.1 U2.V2
VIN: D12.C D14.C D16.C D18.C IC13.4 OD3.5 OD3.6